# Altium PCB Copy of bug4.PcbDoc
Units mil, origin at the board's own origin, x right, y up, seen from the top; angles counter-clockwise.
Board outline 2630.5 x 2335 mil, 4 copper layers (Top Layer, Mid-Layer 1, Mid-Layer 2, Bottom Layer); 103 components, 85 nets, 361 pads, 50 vias.
Unrouted connection lines stored in the file: 187.
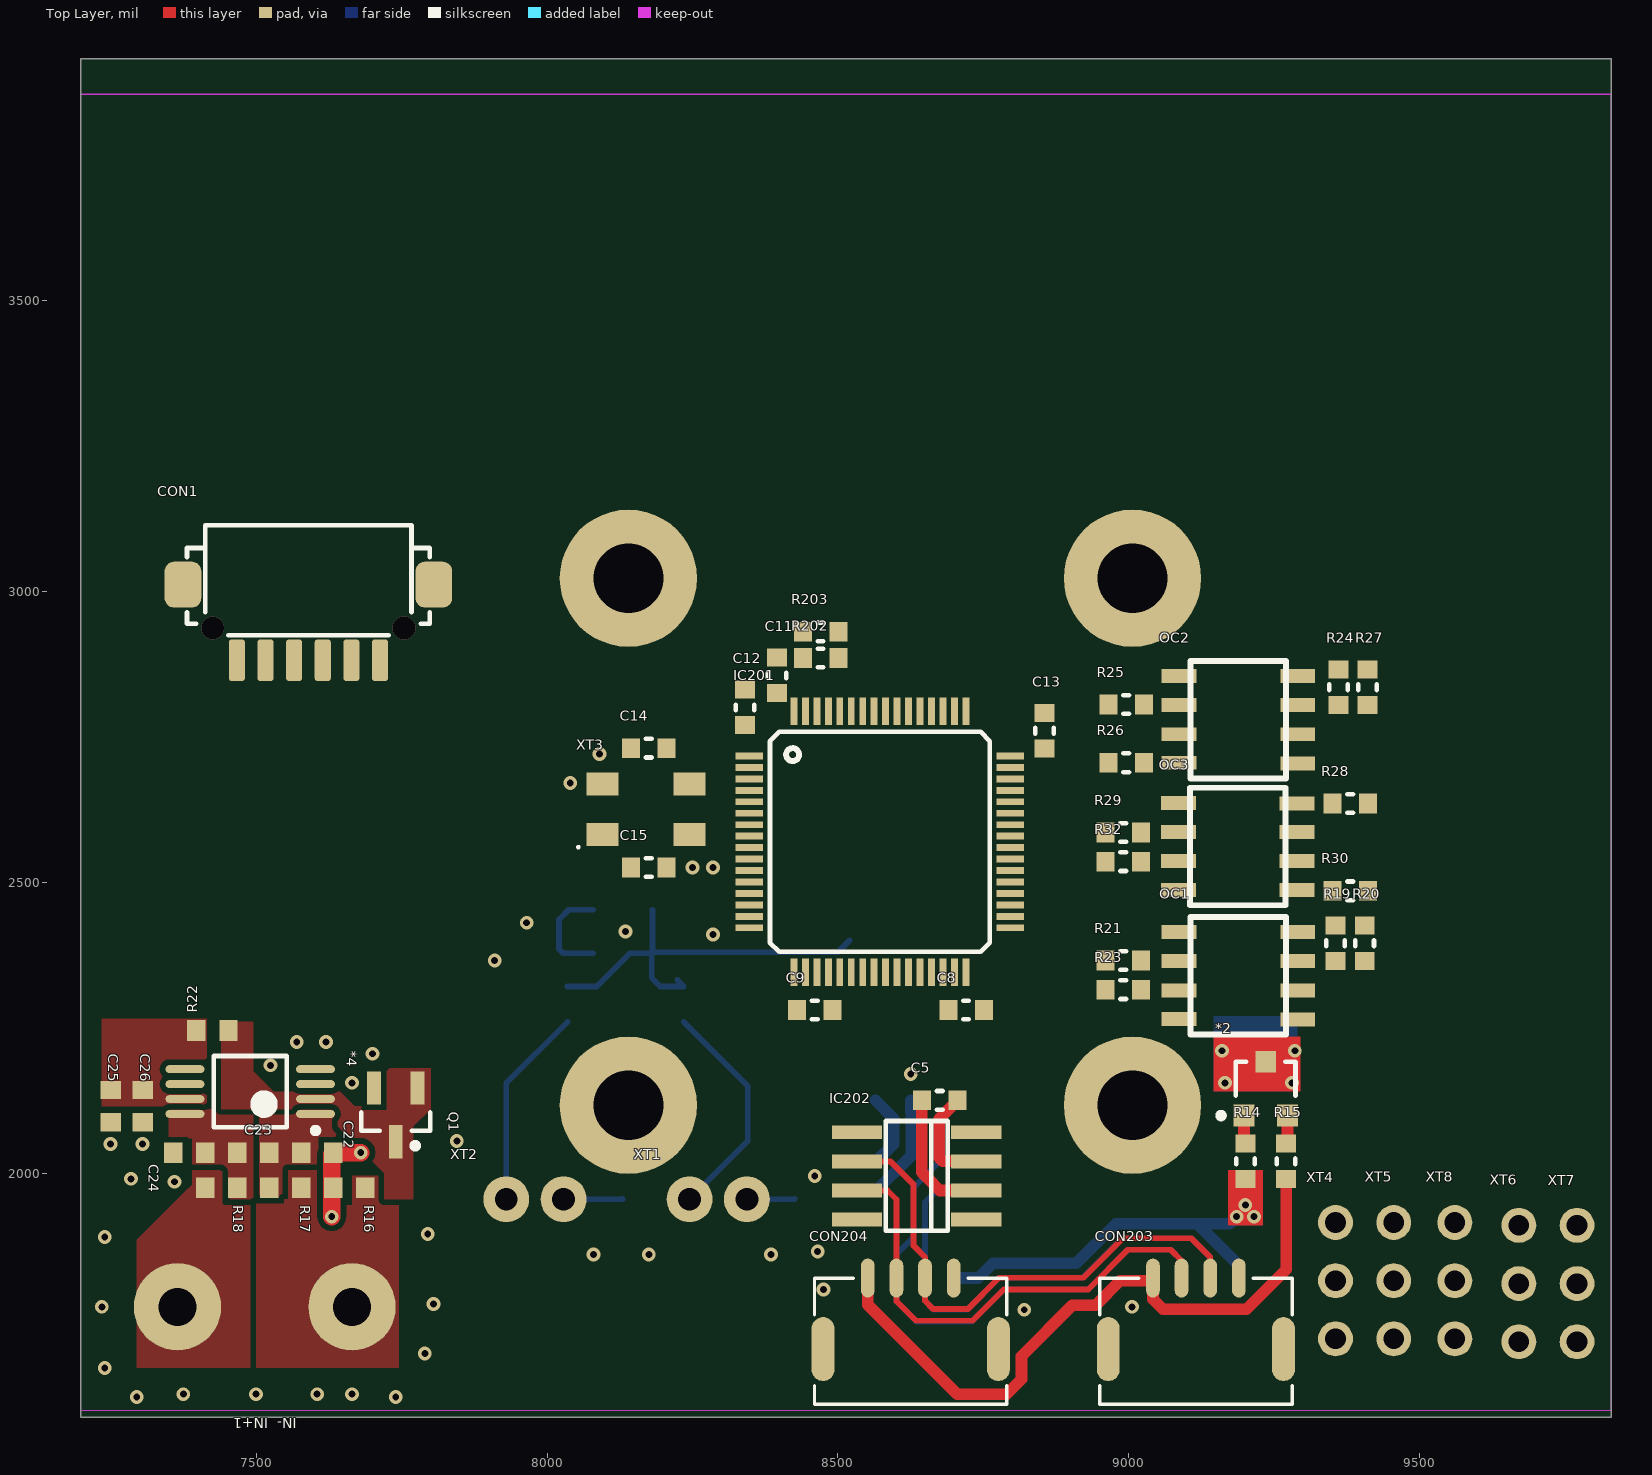
[diagram p0: Top Layer view]
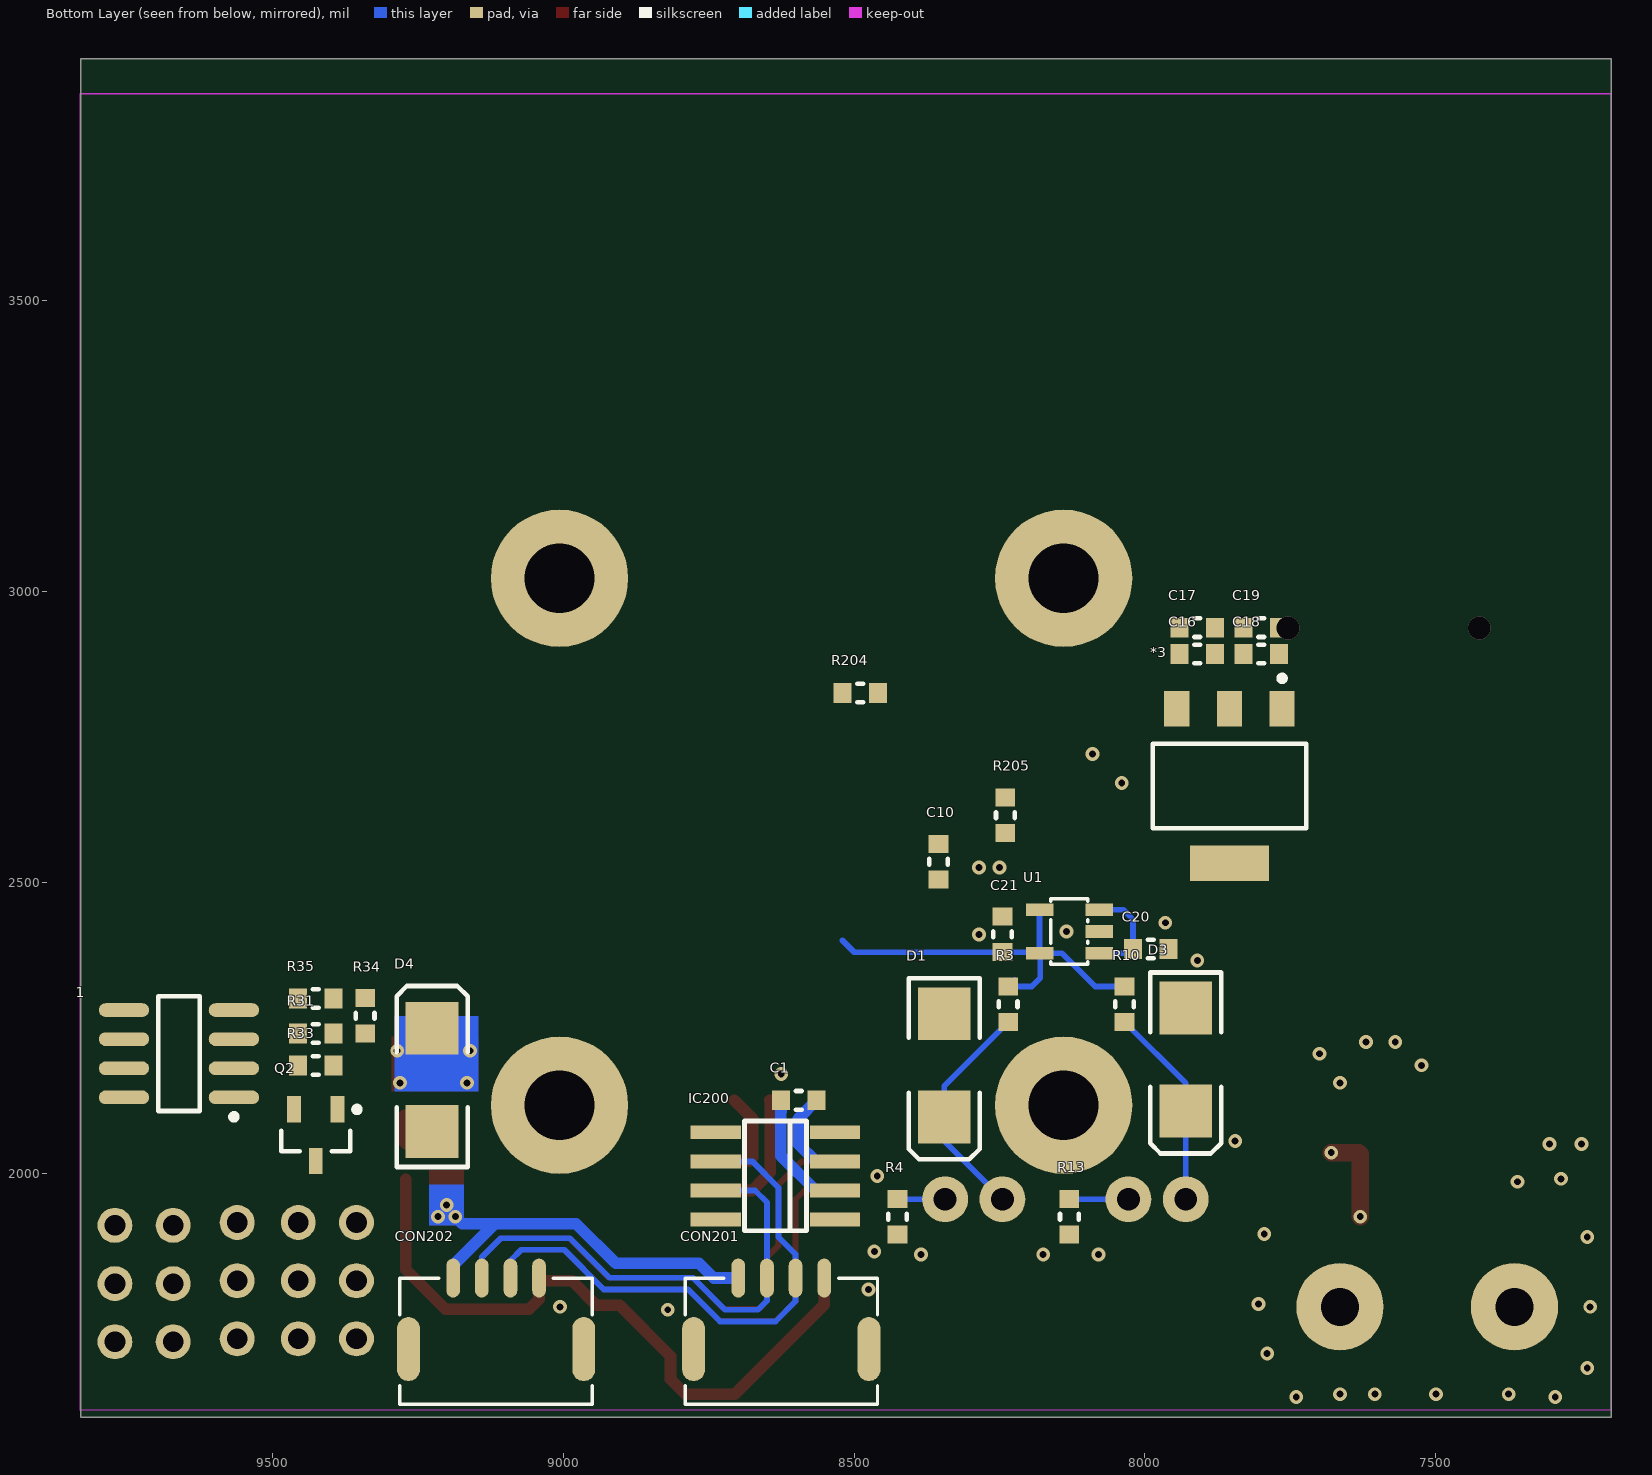
[diagram p1: Bottom Layer view, seen from below]

## Layer stack, top to bottom
Top Solder: solder mask 0.4, Solder Resist, Dk 3.5
Top Layer: signal copper 1.4
Dielectric 1: dielectric 12.6, FR-4, Dk 4.8
Mid-Layer 1: signal copper 1.4
Dielectric2: dielectric 12.6, FR-4, Dk 4.8
Mid-Layer 2: signal copper 1.4
Dielectric3: dielectric 12.6, FR-4, Dk 4.8
Bottom Layer: signal copper 1.4
Bottom Solder: solder mask 0.4, Solder Resist, Dk 3.5

## Board outline
7198.5,1580 9829,1580 9829,3915 7198.5,3915

## Design rules (kind name [scope] priority, off if disabled: settings)
Clearance [All] p1: gap=10 ignorepadtopadclearanceinfootprint=FALSE except(0: Arc-Hole Track-Hole SMDPad-Hole THPad-Hole Via-Hole Fill-Hole Poly-Hole Region-Hole Text-Hole)
PlaneConnect [All] p1: planeconnectstyle=Direct reliefexpansion=20 reliefentries=4 reliefconductorwidth=10 reliefairgap=10
PolygonConnect [All] p1: connectstyle=Direct reliefconductorwidth=10 reliefentries=4 polygonreliefangle="90 Angle" airgapwidth=10
RoutingVias [All] p1: holewidth=28 width=50 viastyle="Through Hole" minholewidth=28 minwidth=50 maxholewidth=28 maxwidth=50
SolderMaskExpansion [All] p1: expansion=4
Width [All] p1: maxlimit=100 minlimit=10 preferedwidth=20
29 further rules are at their usual default settings.

## Components (designator, comment, footprint, x,y, rotation, side; value= is the part's Value field where it differs from the comment)
1 "IRF7105" SO-8_N 9660,2205 r0 bottom
*1 "Component_1" TO-220AB 2735,3660 r0 top
*2 "BAT54_C" sot-23 9235,2145 r0 top
*3 "REG1117-3.3" ZZ311 7855,2665 r0 bottom
*4 "AD8495" PW008_N 7490,2140 r180 top
BQ1 "HC49/S" HS49/S 11720,3130 r90 top
C1 "0.1" SMT0603/VISHAY 8595,2125 r180 bottom value=100nF
C2 "0.1" 1608[0603] 10500,2625 r270 bottom value=100nF
C3 "1206" 2220 10685,2360 r180 bottom value="47uF 25V"
C4 "2220" 2220 10630,2920 r270 bottom value="4.7uF 100v"
C5 "0.1" SMT0603/VISHAY 8675,2125 r180 top value=100nF
C6 "47pF" SMT0603/VISHAY 9385,4365 r0 bottom value=100nF
C7 "4.7nF" SMT0603/VISHAY 9415,4275 r90 bottom value=100nF
C8 "0.1" SMT0603/VISHAY 8720,2280 r0 top value=100nF
C9 "0.1" SMT0603/VISHAY 8460,2280 r0 top value=100nF
C10 "0.1" SMT0603/VISHAY 8355,2535 r270 bottom value=100nF
C11 "0.1" SMT0603/VISHAY 8395,2855 r270 top value=100nF
C12 "0.1" SMT0603/VISHAY 8340,2800 r270 top value=100nF
C13 "0.1" SMT0603/VISHAY 8855,2760 r90 top value=100nF
C14 "10pF" SMT0603/VISHAY 8175,2730 r0 top value=100nF
C15 "10pF" SMT0603/VISHAY 8175,2525 r180 top value=100nF
C16 "0.1" SMT0603/VISHAY 7910,2892.13 r0 bottom value=100nF
C17 "0.1" SMT0603/VISHAY 7910,2937.13 r0 bottom value=100nF
C18 "0.1" SMT0603/VISHAY 7800,2892.13 r0 bottom value=100nF
C19 "0.1" SMT0603/VISHAY 7800,2937.13 r0 bottom value=100nF
C20 "0.1" SMT0603/VISHAY 7990,2385 r180 bottom value=100nF
C21 "0.1" SMT0603/VISHAY 8245,2410 r270 bottom value=100nF
C22 "0.01" 1608[0603] 7605,2035 r180 top value=100nF
C23 "0.1" 1608[0603] 7495,2035 r180 top value=100nF
C24 "0.01" 1608[0603] 7385,2035 r180 top value=100nF
C25 "0.1" 1608[0603] 7250,2115 r270 top value=100nF
C26 "1uF" 1608[0603] 7305,2115 r270 top value=100nF
CON1 "CONN HEADER SH 6POS SIDE 1MM TIN" "HIROSE DF13-6P-1.25H" 7590,3015 r0 top
CON201 "CON-4P-RA" JST_GH-4P-RA 8625,1705 r0 bottom
CON202 "CON-4P-RA" JST_GH-4P-RA 9115,1705 r0 bottom
CON203 "CON-4P-RA" JST_GH-4P-RA 9115,1705 r180 top
CON204 "CON-4P-RA" JST_GH-4P-RA 8625,1705 r180 top
D1 "stb.3.3" SMB 8345,2185 r270 bottom
D2 "B560C" SMC 9550,4410 r270 bottom
D3 "stb.3.3" SMB 7930,2195 r270 bottom
D4 "sm6t15a" SMB 9225,2160 r90 bottom
DA1 "=Device" D8_L_G 10635,2625 r270 bottom
IC200 "SN65HVD232D" SOIC8 8635,1995 r0 bottom
IC201 "STM32F105" TQFP64-10X10 8572,2569 r0 top
IC202 "SN65HVD232D" SOIC8 8635,1995 r180 top
"IN-  IN+1" "X977B02" X977B02 7515,1770 r0 top
L1 "SPM5020T-100M-LR" Inductor 10425,2415 r270 bottom
OC1 "HCPL0631" UCC37322P 9270,2440 r270 top
OC2 "HCPL0631" UCC37322P 9270,2880 r270 top
OC3 "HCPL0631" UCC37322P 9105,2460 r90 top
P1 "Header 4" XT-30PW 10530,3860 r180 top
Q1 "BC848" SOT23_M 7740,2100 r270 top
Q2 "BFS17A" SOT-23_N 9425,2065 r270 bottom
R1 "1k" SMT0603/VISHAY 10095,2967.48 r90 top
R2 "1k" SMT0603/VISHAY 10095,3097.48 r90 top
R3 "1k" SMT0603/VISHAY 8235,2290 r270 bottom
R4 "1k" SMT0603/VISHAY 8425,1925 r270 bottom
R5 "1210" 14-1210 10450,2875 r90 bottom value=0R
R6 "442k" SMT0603/VISHAY 10805,2815 r180 bottom
R7 "16.9k" SMT0603/VISHAY 9350,4275 r90 bottom
R8 "36k" SMT0603/VISHAY 10805,2515 r0 bottom
R9 "200k" SMT0603/VISHAY 10775,2710 r270 bottom
R10 "1k" SMT0603/VISHAY 8035,2290 r270 bottom
R11 "6.8k" SMT0603/VISHAY 10775,2595 r270 bottom
R12 "243k" SMT0603/VISHAY 10835,2710 r90 bottom
R13 "1k" SMT0603/VISHAY 8130,1925 r270 bottom
R14 "0.0R" SMT0603/VISHAY 9200,2020 r90 top value=3K9
R15 "0.0R" SMT0603/VISHAY 9270,2020 r90 top value=3K9
R16 "1M" 1608[0603] 7660,1975 r0 top
R17 "100R" 1608[0603] 7550,1975 r180 top
R18 "100R" 1608[0603] 7440,1975 r0 top
R19 "Res3" SMT0603/VISHAY 9355,2395 r90 top value=2kR
R20 "Res3" SMT0603/VISHAY 9405,2395 r90 top value=2kR
R21 "330" SMT0603/VISHAY 8990,2365 r0 top
R22 "1k" 1608[0603] 7425,2245 r180 top
R23 "330" SMT0603/VISHAY 8990,2315 r0 top
R24 "Res3" SMT0603/VISHAY 9360,2835 r90 top value=2kR
R25 "330" SMT0603/VISHAY 8995,2805 r0 top
R26 "330" SMT0603/VISHAY 8995,2705 r0 top
R27 "Res3" SMT0603/VISHAY 9410,2835 r90 top value=2kR
R28 "330" SMT0603/VISHAY 9380,2635 r0 top
R29 "Res3" SMT0603/VISHAY 8990,2585 r0 top value=2kR
R30 "330" SMT0603/VISHAY 9380,2485 r0 top
R31 "Res3" SMT0603/VISHAY 9425,2240 r0 bottom value=2kR
R32 "Res3" SMT0603/VISHAY 8990,2535 r0 top value=2kR
R33 "Res3" SMT0603/VISHAY 9425,2185 r180 bottom value=200R
R34 "Res3" SMT0603/VISHAY 9340,2270 r270 bottom value=2kR
R35 "Res3" SMT0603/VISHAY 9425,2300 r180 bottom value=200R
R202 "3K9" SMT0603/VISHAY 8470,2885 r0 top
R203 "3K9" SMT0603/VISHAY 8470,2930 r0 top
R204 "3K9" SMT0603/VISHAY 8489.44,2825 r0 bottom
R205 "200R" SMT0603/VISHAY 8240,2615 r270 bottom
U1 "3.3V" SOT23-5L 8130,2415 r90 bottom
VD1 "KP-1608SRC-PRV/KINGBRIGHT" 1.6x0.8SMTLED/KINGBRIGHT 10035,2967.48 r270 top
VD2 "KP-1608SRC-PRV/KINGBRIGHT" 1.6x0.8SMTLED/KINGBRIGHT 10035,3097.48 r270 top
XT1 "JST-XH_R" JST-XH-2R 8245,1955 r0 top
XT2 "JST-XH_R" JST-XH-2R 7930,1955 r0 top
XT3 "8 MHz" DFN220P320X110-4N 8170,2625 r0 top
XT4 "PLT-3" PCBComponent_1 9355,1915 r270 top
XT5 "PLT-3" PCBComponent_1 9455,1915 r270 top
XT6 "PLT-3" PCBComponent_1 9670,1910 r270 top
XT7 "PLT-3" PCBComponent_1 9770,1910 r270 top
XT8 "PLT-3" PCBComponent_1 9560,1915 r270 top

## Footprints (in the part's own frame and the unit in brackets; to place one, negate y for a bottom-side part, rotate by r counter-clockwise, add the part's x,y. Pads: shape width x height; smd on the part's side, far side on the other; paste and mask are expansions set on the pad)
1.6x0.8SMTLED/KINGBRIGHT [mm]
  rect 0.8x0.8 smd: 1(-0.825,0) 2(0.825,0)
  silkscreen extent -1.47,-0.64 1.47,0.64, body extent -0.8,-0.4 0.8,0.4, height 0.7
14-1210 [mm] "Chip Resistor, Body 3.2x2.5mm, IPC High Density"
  rect 1.1x2.6 smd: 1(-1.35,0) 2(1.35,0)
  silkscreen extent -0.4,-1.2 0.4,1.2, body extent -1.68,-1.32 1.67,1.32, height 0.9
1608[0603] [mm] "Chip Capacitor, Body 1.6x0.8mm, IPC High Density"
  rect 0.8x0.9 smd: 1(-0.7,0) 2(0.7,0)
  body extent -0.87,-0.48 0.88,0.48, height 1.3
2220 [mm] "Chip Capacitor, Body 5.7x5.0mm, IPC High Density"
  rect 1.4x5.2 smd: 1(-2.5,0) 2(2.5,0)
  silkscreen extent -1.4,-2.5 1.4,2.5, body extent -2.95,-2.63 2.95,2.62, height 1.4
D8_L_G [mm] "SOIC, 8-Leads, Body 4.9x3.9mm, Pitch 1.27mm, IPC High Density"
  oval 1.9x0.6 smd: 1(-2.35,1.905) 2(-2.35,0.635) 3(-2.35,-0.635) 4(-2.35,-1.905) 5(2.35,-1.905) 6(2.35,-0.635) 7(2.35,0.635) 8(2.35,1.905)
  rect 1.9x5 smd: 9(0,0)
  silkscreen extent -2.47,-2.5 1,2.88, body extent -2,-2.5 2,2.5, height 1.75
DFN220P320X110-4N [mm] "DFN, 4-Leads, Body 5.00x3.20mm, Pitch 2.20mm, IPC Medium Density"
  rect 1.4x1 smd: 1(-1.9,-1.1) 3(1.9,1.1) G(-1.9,1.1) G(1.9,-1.1)
  silkscreen extent -3,-1.7 -2.9,-1.6, body extent -2.55,-1.65 2.55,1.65, height 1.1
"HIROSE DF13-6P-1.25H" [mm] "DF13 Series 1.25mm pitch miniature crimping connector single row"
  rrect30% 0.7x1.8 smd: 1(-3.125,-3.4) 2(-1.875,-3.4) 3(-0.625,-3.4) 4(0.625,-3.4) 5(1.875,-3.4) 6(3.125,-3.4)
  rrect50% 1.6x2 smd: M(-5.475,-0.1) M(5.475,-0.1)
  silkscreen extent -5.3,-2.3 5.3,2.5, body extent -6.08,-3.9 6.07,2.6, height 3.59
HS49/S [mm]
  round 1.2 hole 0.7: 1(0,0) 2(4.65,0)
  silkscreen extent -3.47,-2.5 8.13,2.5
Inductor [mil]
  rect 55x110 smd: 1(-87,0) 2(87,0)
  body extent -106,-100 106,101, height 78
JST-XH-2R [mm]
  round 2 hole 1: 1(0,0) 2(2.5,0)
  body extent -2.45,-9.14 4.95,0.38, height 5.95
JST_GH-4P-RA [mm]
  rrect100% 0.6x1.7 smd: 1(1.875,-2.91) 2(0.625,-2.91) 3(-0.625,-2.91) 4(-1.875,-2.91)
  rrect100% 1x2.8 smd: M$0(-3.825,0.19) M$1(3.825,0.19)
  silkscreen extent -4.2,-2.9 4.2,2.6, body extent -4.25,-2.94 4,1.91, height 4.35
PCBComponent_1 [mil]
  round 60 hole 35.5: 1(0,0) 2(100,0) 3(200,0)
  body extent -13,-51 595,49, height 300
PW008_N [mm] "SOP, 8-Leads, Body 3x4.4mm, Pitch 0.65mm, IPC Medium Density"
  oval 1.7x0.35 smd: 1(-2.85,0.975) 2(-2.85,0.325) 3(-2.85,-0.325) 4(-2.85,-0.975) 5(2.85,-0.975) 6(2.85,-0.325) 7(2.85,0.325) 8(2.85,0.975)
  silkscreen extent -2.98,-1.55 1.6,1.82, body extent -2.25,-1.55 2.25,1.55, height 3.1
SMB [mm] "DO-214-AA/SMB; 2 C-Bend Leads; Body 5.3 x 3.6 mm, inc. leads (LxW)"
  rect 2.3x2.3 smd: 1(-2.25,0) 2(2.25,0)
  silkscreen extent -3.8,-1.55 4.1,1.55
SMC [mm] "DO-214-AB/SMC; 2 C-Bend Leads; Body 7.9 x 5.9 mm, inc. leads (LxW)"
  rect 2.4x3.3 smd: 1(-3.475,0) 2(3.475,0)
  silkscreen extent -5.08,-2.05 5.42,2.06
SMT0603/VISHAY [mm]
  rect 0.787x0.864 smd: 1(-0.775,0) 2(0.775,0)
  silkscreen extent -0.13,-0.41 0.13,0.41, body extent -0.78,-0.43 0.78,0.43, height 0.45
SO-8_N [mm] "8-Pin Small Outline Integrated Circuit 1.27 mm Pitch, IPC Medium Density"
  oval 2.2x0.6 smd: 1(-2.4,1.905) 2(-2.4,0.635) 3(-2.4,-0.635) 4(-2.4,-1.905) 5(2.4,-1.905) 6(2.4,-0.635) 7(2.4,0.635) 8(2.4,1.905)
  silkscreen extent -2.52,-2.5 0.9,2.88, body extent -1.95,-2.45 1.95,2.45, height 1.75
SOIC8 [mil]
  rect 86.61x23.62 smd: 1(-102.36,75) 2(-102.36,25) 3(-102.36,-25) 4(-102.36,-75) 5(102.36,-75) 6(102.36,-25) 7(102.36,25) 8(102.36,75)
  silkscreen extent -53,-94 53,94, body extent -79,-98 79,98, height 69
SOT23-5L [mil]
  rect 21.65x47.24 smd: 1(-37.4,-51.18) 2(0,-51.18) 3(37.4,-51.18) 4(37.4,51.18) 5(-37.4,51.18)
  silkscreen extent -56,-32 56,32
SOT23_M [mm] "SOT23, 3-Leads, Body 2.9x1.3mm, Pitch 0.95mm, Lead Span 2.3mm - Reverse Pinning, IPC Low Density"
  rect 1.45x0.6 smd: 1(1.175,0) 2(-1.175,-0.95) 3(-1.175,0.95)
  silkscreen extent -0.1,-1.5 1.47,1.5, body extent -0.7,-1.5 0.7,1.5, height 1.1
sot-23 [mm] "SOT-23; 3 Leads; Body 3.1 x 2.5 mm, inc. leads (LxW max)"
  rect 0.9x0.95 smd: 1(-0.95,-1.175) 2(0.95,-1.175) 3(0,1.175)
  silkscreen extent -2.07,-1.3 1.3,1.18
SOT-23_N [mm] "SOT23, 3-Leads, Body 2.9x1.3mm, Pitch 0.95mm, Lead Span 2.3mm, IPC Medium Density"
  rect 1.15x0.6 smd: 1(-1.125,0.95) 2(-1.125,-0.95) 3(1.125,0)
  silkscreen extent -1.25,-1.5 0.7,1.92, body extent -0.7,-1.5 0.7,1.5, height 1.11
TO-220AB [mm] "TO, Thru-Hole, Vertical, Heatsink Mounted; 3 In-Line Leads; Pitch 2.54 mm"
  rect 1.6x1.6 hole 1: 1(-2.54,0)
  round 1.6 hole 1: 2(0,0) 3(2.54,0)
  silkscreen extent -5.35,-1.85 5.35,2.85
TQFP64-10X10 [mm]
  rect 1.2x0.3 smd: 1(-5.7,3.75) 2(-5.7,3.25) 3(-5.7,2.75) 4(-5.7,2.25) 5(-5.7,1.75) 6(-5.7,1.25) 7(-5.7,0.75) 8(-5.7,0.25) 9(-5.7,-0.25) 10(-5.7,-0.75) 11(-5.7,-1.25) 12(-5.7,-1.75) 13(-5.7,-2.25) 14(-5.7,-2.75) 15(-5.7,-3.25) 16(-5.7,-3.75) 33(5.7,-3.75) 34(5.7,-3.25) 35(5.7,-2.75) 36(5.7,-2.25) 37(5.7,-1.75) 38(5.7,-1.25) 39(5.7,-0.75) 40(5.7,-0.25) 41(5.7,0.25) 42(5.7,0.75) 43(5.7,1.25) 44(5.7,1.75) 45(5.7,2.25) 46(5.7,2.75) 47(5.7,3.25) 48(5.7,3.75)
  rect 0.3x1.2 smd: 17(-3.75,-5.7) 18(-3.25,-5.7) 19(-2.75,-5.7) 20(-2.25,-5.7) 21(-1.75,-5.7) 22(-1.25,-5.7) 23(-0.75,-5.7) 24(-0.25,-5.7) 25(0.25,-5.7) 26(0.75,-5.7) 27(1.25,-5.7) 28(1.75,-5.7) 29(2.25,-5.7) 30(2.75,-5.7) 31(3.25,-5.7) 32(3.75,-5.7) 49(3.75,5.7) 50(3.25,5.7) 51(2.75,5.7) 52(2.25,5.7) 53(1.75,5.7) 54(1.25,5.7) 55(0.75,5.7) 56(0.25,5.7) 57(-0.25,5.7) 58(-0.75,5.7) 59(-1.25,5.7) 60(-1.75,5.7) 61(-2.25,5.7) 62(-2.75,5.7) 63(-3.25,5.7) 64(-3.75,5.7)
  silkscreen extent -4.8,-4.8 4.8,4.8, body extent -5,-5 5,5, height 1.6
UCC37322P [mil]
  rect 24x60 smd: 1(26,-184) 2(76,-184) 3(126,-184) 4(175,-184) 5(176,20) 6(126,20) 7(76,20) 8(26,20)
  silkscreen extent 0,-164 202,0, body extent 0,-164 202,0, height 143
X977B02 [mil]
  round 150 hole 65: 1(-150,0) 2(150,0)
  body extent -305,-175 305,175, height 373
XT-30PW [mil]
  round 118 hole 70: 1(-98,0) 2(98,0)
  round 100 / inner round 118 / far side round 118 hole 45: 4(-216,393) 5(216,393)
ZZ311 [mm] "SOT-223/SC-73; 4 Leads; Body 6.7 x 7.3 mm, inc. leads (LxW max)"
  rect 1.1x1.55 smd: 1(-2.3,-3.375) 2(0,-3.375) 3(2.3,-3.375)
  rect 3.45x1.55 smd: 4(0,3.375)
  silkscreen extent -3.35,-4.82 3.35,1.85

## Part data
1: library part Component_1
*3: library part REG1117-5, "800mA and 1A Low Dropout Positive Regulator 2.85V, 3.3V, 5V, and Adjustable", ComponentLink1Description="Manufacturer Link", ComponentLink1URL=http://www.ti.com/, ComponentLink2Description=Datasheet, ComponentLink2URL=http://www-s.ti.com/sc/ds/REG1117.pdf, DatasheetVersion=Sep-1997, LatestRevisionDate=17-Jul-2002, LatestRevisionNote="Re-released for DXP Platform.", PackageDescription="SOT-223/SC-73; 4 Leads; Body 6.7 x 7.3 mm, inc. leads (LxW max)", PackageReference=ZZ311, PackageVersion=revC, Published=8-Jun-2000, Publisher="Altium Limited"
BQ1: "Crystal Oscillator", PackageReference=hs_49u
C1 C2 C5 C6 C7 C8 C9 C10 C11 C12 C13 C14 C15 C16 C17 C18 C19 C20 C21 C22 C23 C24 C25 C26: library part "Cap Semi", "Capacitor (Semiconductor SIM Model)", LatestRevisionDate=29-May-2009, LatestRevisionNote="IPC-7351 Footprint Added.", PackageDescription="Chip Capacitor", PackageReference=C1206, Published=8-Jun-2000, Publisher="Altium Limited"
C3: library part "Cap Semi", "100uF", LatestRevisionDate=29-May-2009, LatestRevisionNote="IPC-7351 Footprint Added.", PackageDescription="Chip Capacitor", PackageReference=C1206, Published=8-Jun-2000, Publisher="Altium Limited"
C4: library part "Cap Semi", "4.7uF 100v", LatestRevisionDate=29-May-2009, LatestRevisionNote="IPC-7351 Footprint Added.", PackageDescription="Chip Capacitor", PackageReference=C2220, Published=8-Jun-2000, Publisher="Altium Limited"
CON1: library part DF13_6P_1, DIGIKEY#=455-1806-1-ND, MANF="JST Sales America Inc", MANF#=SM06B-SRSS-TB(LF)(SN)
CON201 CON202 CON203 CON204: "Connector Receptacle 4 Position 0.049\" (1.25mm) Tin Surface Mount, Right Angle", DIGIKEY#=WM4948CT-ND, MANF=Molex, MANF#=5023860470
D1 D3 D4: library part Diode, "Default Diode", Code_JEDEC=DO-214-AB, LatestRevisionDate=17-Jul-2002, LatestRevisionNote="Re-released for DXP Platform.", PackageDescription="DO-214-AB/SMC; 2 C-Bend Leads; Body 7.9 x 5.9 mm, inc. leads (LxW)", PackageReference=SMC, PackageVersion=Sep-1996, Published=8-Jun-2000, Publisher="Altium Limited"
D2: "60V 0.5A Shottcky Diode"
DA1: library part TPS54560, "150mA Low-Noise Low-Dropout Regulator Whit Shutdown"
IC200 IC202: "IC CAN TRANSCEIVER 3.3V 8-SOIC", DIGIKEY#=296-26344-1-ND, MANF="Texas Instruments", MANF#=SN65HVD232DR, SN65HVD232=SN65HVD232
IC201: "MCU ARM 256KB FLASH MEM 64-LQFP", OPERATING_TEMP="-40°C ~ 105°C (TA)", DIGIKEY#=497-8918-ND, MANF=STMicroelectronics, MANF#=STM32F105RCT6, STM32F105=STM32F105
L1: library part L-EPCOS_B82464
OC1 OC2 OC3: "dual optocouplers"
P1: "Header, 4-Pin", LatestRevisionDate=17-Jul-2002, LatestRevisionNote="Re-released for DXP Platform.", Publisher="Altium Limited"
Q1: library part BF547, "NPN 1 GHz Wideband Transistor", ComponentAvailability=Obsolete, ComponentLink1Description="Manufacturer Link", ComponentLink1URL=http://www.semiconductors.philips.com/, ComponentLink2Description=Datasheet, ComponentLink2URL=http://www.semiconductors.philips.com/acrobat/datasheets/BF547_3.pdf, ComponentLink3Description="Discontinuation Notice", ComponentLink3URL=http://www.semiconductors.philips.com/pip/old/BF547.html, DatasheetVersion=Sep-1995, LatestRevisionDate=12-Dec-2006, LatestRevisionNote="IPC-7351 Footprint Added.", PackageDescription="3-Pin SOT-23 Package 0.95 mm Pitch, 2.3 mm Lead Span", PackageReference=SOT23, PackageVersion=May-1999, Published=17-Sep-2003, Publisher="Altium Limited"
Q2: library part 2N3904, "NPN General Purpose Amplifier", ComponentLink1Description="Manufacturer Link", ComponentLink1URL=http://www.fairchildsemi.com/, ComponentLink2Description=Datasheet, ComponentLink2URL=http://www.fairchildsemi.com/ds/2N%2F2N3904.pdf, DatasheetVersion=1997, LatestRevisionDate=15-Jan-2003, LatestRevisionNote="PCB Footprint 'BCY-W3/D4.7' replaced", PackageDescription="TO, Flat Index; 3 In-Line, Axial Leads; Body Dia. 4.5mm; Leads 0.51 x 0.48 mm (max)", PackageReference=TO-92A, PackageVersion=Sep-1998, Published=8-Jun-2000, Publisher="Altium Limited"
R1 R2 R3 R4 R10 R13 R21 R23 R25 R26 R28 R30: library part CRCW060310K0FKEA/MURATA, "10k", PackageReference=0603
R5: library part Res3, "fuse", LatestRevisionDate=29-May-2009, LatestRevisionNote="IPC-7351 Footprint Added.", PackageDescription="Chip Resistor", PackageReference=J1-0603, Published=8-Jun-2000, Publisher="Altium Limited"
R6 R7 R8 R9 R11 R12 R16 R17 R18 R22: library part R0402
R14 R15 R202 R203 R204: library part 3K9-0402, PACKAGE=0402, TOLERANCE=1%, DIGIKEY#=311-3.90KLRCT-ND, MANF=Yageo, MANF#=RC0402FR-073K9L
R19 R20 R24 R27 R29 R31 R32 R33 R34 R35: "Resistor", LatestRevisionDate=29-May-2009, LatestRevisionNote="IPC-7351 Footprint Added.", PackageDescription="Chip Resistor", PackageReference=J1-0603, Published=8-Jun-2000, Publisher="Altium Limited"
R205: library part 200R-0402, PACKAGE=0402, TOLERANCE=1%, ASSEMBLY=DNM, DIGIKEY#=311-200LRCT-ND, MANF=Yageo, MANF#=RC0402FR-07200RL
U1: library part LP5907MFX-3.3/NOPB, "IC REG LDO 3.3V 0.25A SOT23-5", Current - Limit (Min)=-, Current - Output=250mA, Manufacturer="Texas Instruments", Operating Temperature="-40°C ~ 125°C", Package / Case="SC-74A, SOT-753", Supplier Device Package=SOT-23, Supplier Part Number 1=296-38557-1-ND, Voltage - Input="Up to 5.5V", Category="Integrated Circuits (ICs)", ComponentLink1Description=http://www.ti.com/lit/ds/symlink/lp5907.pdf, ComponentLink1URL=http://www.ti.com/lit/ds/symlink/lp5907.pdf, Mounting Type="Surface Mount", Packaging="Cut Tape (CT)", Part Status=Active, Pricing 1="1=0.57, 10=0.487, 100=0.3634, 500=0.28552, 1000=0.22063 (USD)", Regulator Topology="Positive Fixed", RoHS="RoHS Compliant", Stock 1=39845, Supplier 1=Digi-Key, Voltage - Dropout (Typical)=-, Voltage - Output=3.3V
VD1 VD2: "Red 0603 LED", PackageReference=0603
XT1 XT2: library part TempXT_R
XT3: library part ABM3B-8.000MHZ-10-1-U-T, "FA-238 16.0000MB-C3", Frequency Stability=±10ppm, Load Capacitance=10pF, Manufacturer="Abracon LLC", Operating Mode=Fundamental, Operating Temperature="-10°C ~ 60°C", Package / Case="4-SMD, No Lead", Ratings=-, Supplier Part Number 1=535-9721-1-ND, Category="Crystals, Oscillators, Resonators", ComponentLink1Description=http://www.abracon.com/Resonators/abm3b.pdf, ComponentLink1URL=http://www.abracon.com/Resonators/abm3b.pdf, Frequency Tolerance=±10ppm, Height - Seated (Max)="0.043\" (1.10mm)", Manufacturer Part Number=ABM3B-8.000MHZ-10-1-U-T, Mounting Type="Surface Mount", Packaging="Cut Tape (CT)", Part Status=Active, Pricing 1="1=0.69, 10=0.578, 50=0.5198, 100=0.462, 500=0.4389 (USD)", Pricing 2="1000=0.336, 3000=0.315, 5000=0.3045, 10000=0.294 (USD)", RoHS="RoHS Compliant", Size / Dimension="0.197\" L x 0.126\" W (5.00mm x 3.20mm)", Stock=35437, Supplier 1=Digi-Key, Supplier 2=Digi-Key, Supplier Part Number 2=535-9721-2-ND, Type="MHz Crystal"

## Free pads (board coordinates)
  round 236 hole 120: 10(8139.79,2116.52) 11(8139.79,3022.03) 12(9005.93,3022.03) 13(9005.93,2116.52)

## Via types
v1: diameter 23.62/0/23.62/23.62 (per signal layer), hole 11.81, Top Layer to Bottom Layer, 48 vias
v2: diameter 39.37, hole 39.37, Top Layer to Bottom Layer, tented both sides, 2 vias

## Nets (pads, with @x,y where several pads share a name; then routed paths per layer and width w, separated by ;. In a path a pad name is that pad's centre, name@x,y a point inside that pad or via, vN(x,y) a via of type N, cw(c..) or ccw(c..) an arc to the next point about the centre after c; other vN are vias at no path point)
BackupPWM: IC201.17
BOOT0: IC201.60 R204.2
CAN1_RX: IC200.4 IC201.44
CAN1_TX: IC200.1 IC201.45
CAN2_RX: IC201.33 IC202.4
CAN2_TX: IC201.34 IC202.1
CoolerPWM: IC201.27 R21.1
FuelSensor: IC201.50 OC3.7 R32.2
GND: *1.1 *3.1 *4.3 C1.1 C3.1 C4.1 C5.2 C6.2 C7.2 C8.1 C9.1 C10.1 C11.1 C12.1 C13.1 C14.1 C15.1 C16.1 C17.1 C18.1 C19.1 C20.2 C21.1 C22.1 C24.2 C25.2 C26.2 CON1.6 CON201.4 CON202.4 CON203.4 CON204.4 D1.1 D2.1 D3.1 D4.1 DA1.7 DA1.9 IC200.2 IC201.10 IC201.12 IC201.18 IC201.24 IC201.31 IC201.47 IC201.63 IC202.2 OC2.3 OC3.5 P1.2 Q1.2 R4.2 R9.2 R11.1 R12.1 R13.2 R16.1 R204.1 U1.2 VD1.2 VD2.2 XT3.G | length 602.3
  Top Layer w20: C5.2 8644.06,2124.57 8644.06,2001.3 8655,1990.36 8655,1990 8675,1970 IC202.2
  Top Layer w30: v1(7630,1925) 7630,2032.44 C22.1 v1(7680,2035)
  Bottom Layer w20: IC200.2 8566.04,1970 8625.94,2029.91 8625.94,2105.97 8625.51,2106.4 C1.1
  other v1: 7295,1615 7740,1615 7375,1620 7500,1620 7605,1620 7665,1620 7240,1665 7790,1690 8820,1765 7235,1770 9005,1770 7805,1775 8475,1800 8080,1860 8175,1860 8385,1860 8465,1865 7240,1890 7795,1895 7360,1985 7285,1990 8460,1995 7250,2050 7305,2050 7845,2055 7665,2155 8625,2170 7525,2185 7700,2205 7570,2225 7620,2225 7910,2365 8285,2410 8135,2415 7965,2430 8250,2525 8285,2525 8040,2670 8090,2720
GND_OUT: 1.1 OC1.5 OC2.5 OC3.2 Q2.2 XT4.3 XT5.3 XT6.3 XT8.3
GPIO_PMU_1: IC201.56
GPIO_PMU_2: IC201.57
I2C_SCL: IC201.61 R202.2
I2C_SDA: IC201.62 R203.2
IBAT: *4.2 IC201.11 Q1.1 Q1.3 R22.1
IGEN: *4.5 *4.6 IC201.21
Ignition_on_boolean: IC201.15 R26.1
LED_R: IC201.37 R2.2
Net1_2: 1.2 R33.1
Net1_4: 1.4 R35.1
Net1_5: 1.5 1.6 XT7.2
Net1_7: 1.7 1.8 OC3.3 XT7.3
Net*2_1: *2.1 R14.2 | length 49.2
  Top Layer w20: *2.1 9197.6,2052.91 R14.2
Net*2_2: *2.2 R15.2 | length 49.2
  Top Layer w20: R15.2 9272.4,2052.91 *2.2
Net*4_1: *4.1 C22.2 C23.1 R17.2
Net*4_8: *4.8 C23.2 C24.1 R18.2
NetC2_1: C2.1 DA1.1
NetC2_2: C2.2 D2.2 DA1.8 L1.1
NetC4_2: C4.2 DA1.2 R5.1 R6.2
NetC6_1: C6.1 DA1.6 R7.2
NetC7_1: C7.1 R7.1
NetCON201_2: CON201.2 CON202.2 IC200.7 | length 862.1
  Bottom Layer w10: IC200.7 8670,1970 8649.61,1949.61 CON201.2 8649.61,1780.39 8665,1765 8721.72,1765 8776.72,1820 8920,1820 8988.03,1888.04 9106.97,1888.04 9139.61,1855.39 CON202.2
NetCON201_3: CON201.3 CON202.3 IC200.6 | length 926.6
  Bottom Layer w10: IC200.6 8675,2020 8629.61,1974.61 8629.61,1889.61 8600.39,1860.39 CON201.3 8600.39,1779.61 8635,1745 8730,1745 8785,1800 8930,1800 8998.03,1868.04 9071.97,1868.04 9090.39,1849.61 CON202.3
NetCON203_2: CON203.2 CON204.2 IC202.7 | length 846.2
  Top Layer w10: IC202.7 8585,1970 8600.39,1954.61 CON204.2 8600.39,1779.61 8633.9,1746.11 8731.1,1746.11 8785,1800 8930,1800 8998.03,1868.04 9071.97,1868.04 9090.39,1849.61 CON203.2 CON203.2@9090.39,1814.57
NetCON203_3: CON203.3 CON204.3 IC202.6 | length 922.7
  Top Layer w10: IC202.6 8590,2020 8630,1980 8630,1875 8650,1855 8650,1814.96 8649.61,1814.57 8649.61,1780.39 8663.9,1766.11 8722.82,1766.11 8776.72,1820 8921.72,1820 8989.75,1888.04 9106.97,1888.04 9139.61,1855.39 CON203.3 CON203.3@9139.61,1814.57
NetDA1_3: DA1.3 R6.1 R12.2
NetDA1_4: DA1.4 R9.1
NetDA1_5: DA1.5 R8.1 R11.2
"NetIN-  IN+1_1": "IN-  IN+1.1" R18.1
"NetIN-  IN+1_2": "IN-  IN+1.2" R16.2 R17.1
NetOC1_2: OC1.2 R21.2
NetOC1_3: OC1.3 R23.2
NetOC1_6: OC1.6 R20.1 XT5.1
NetOC1_7: OC1.7 R19.1 XT4.1
NetOC2_2: OC2.2 R25.2
NetOC2_4: OC2.4 R26.2
NetOC2_6: OC2.6 R27.1 R34.1 R35.2
NetOC2_7: OC2.7 R24.1 XT6.1
NetOC3_1: OC3.1 R30.1
NetOC3_4: OC3.4 R28.1
NetQ2_1: Q2.1 R34.2
NetQ2_3: Q2.3 R31.1 R33.2
NetR1_1: R1.1 VD1.1
NetR2_1: R2.1 VD2.1
NetR4_1: R4.1 XT1.2 | length 81.8
  Bottom Layer w10: XT1.2 8424.49,1955 R4.1
NetR13_1: R13.1 XT2.2 | length 101.8
  Bottom Layer w10: XT2.2 8129.49,1955 R13.1
NetR28_2: R28.2 XT7.1
NetR30_2: R30.2 XT8.1
NRST: IC201.7
OSC_IN_STM: C14.2 IC201.5 XT3.3
OVER_T: IC201.8 R205.1
PB_3: IC201.55
PC_10: IC201.51
PC_11: IC201.52
PC_12: IC201.53
PD_2: IC201.54
PWM: IC201.14
Q0: C15.2 IC201.6 XT3.1
StrtPWM: IC201.23 R23.1
SWCLK: CON1.5 IC201.49
SWDIO: CON1.4 IC201.46
TachoInF: IC201.16 OC3.6 R29.2
ThrottlePWM: IC201.26 R25.1
USART1_RX_inside: CON1.3 IC201.59
USART1_TX_inside: CON1.2 IC201.58
VBAT_SENSE: C21.2 IC201.22 R3.1 R10.1 U1.4 U1.5 | length 712.2
  Bottom Layer w10: R10.1 8085.51,2320.51 8142.6,2377.6 U1.5 ; U1.4 U1.5 ; R3.1@8224.09,2331.42 R3.1 8194.49,2320.51 8180,2335 8180,2376.42 U1.5 ; 8520,2400 8499.49,2379.49 C21.2 8183.07,2379.49 U1.5
VCC_3.3: *3.2 *3.4 *4.7 C1.2 C5.1 C8.2 C9.2 C10.2 C11.2 C12.2 C13.2 C18.2 C19.2 C25.1 C26.1 IC200.3 IC201.1 IC201.13 IC201.19 IC201.32 IC201.48 IC201.64 IC202.3 OC1.1 OC1.4 R1.2 R22.2 R29.1 R32.1 R202.1 R203.1 R205.2 | length 341.7
  Top Layer w20: C5.1 8674.06,2093.54 8674.06,2025.94 8680,2020 IC202.3
  Bottom Layer w20: IC200.3 8566.04,2020 8595.94,2049.91 8595.94,2093.54 C1.2
VCC_50v: P1.1 R5.2
VCC_CAN: *2.3 *3.3 C16.2 C17.2 C20.1 D4.2 OC3.8 U1.1 U1.3 | length 177.2
  Bottom Layer w10: U1.1 8027.91,2377.6 C20.1 8020.51,2435.51 8037.4,2452.4 U1.3
  other v1: 9165,2155 9280,2155 9160,2210 9285,2210
VCC_CAN1: CON201.1 CON202.1 R14.1 | length 652.9
  Bottom Layer w20: CON201.1 8740.93,1819.57 8766.36,1845 8909.64,1845 8977.68,1913.04 9117.32,1913.04 ; v1(9185,1925) 9173.03,1913.04 9117.32,1913.04 ; CON202.1 9188.82,1841.54 9117.32,1913.04
  other v1: 9215,1925 9200,1945
VCC_CAN2: CON203.1 CON204.1 R15.1 | length 1153.9
  Top Layer w20: CON204.1@8551.18,1814.57 8551.18,1773.82 8705,1620 8789.63,1620 8815.27,1645.65 8815.27,1685.28 8902.64,1772.64 8942.64,1772.64 8984.57,1814.57 CON203.1@9041.18,1814.57 ; CON203.1 CON203.1@9041.18,1814.57 ; R15.1 9270,1834.11 9202,1766.11 9058.58,1766.11 9041.18,1783.51 CON203.1@9041.18,1814.57
VCC_servo: 1.3 *1.3 C3.2 L1.2 R8.2 R31.2
VCC_servo_5: *1.2 OC1.8 OC2.8 R19.2 R20.2 R24.2 R27.2 XT4.2 XT5.2 XT6.2 XT8.2
VTMP: D1.2 IC201.9 R3.2 XT1.1 | length 391.5
  Bottom Layer w10: R3.2 8345,2149.49 D1.2 8345,2055 XT1.1
VTMP2: D3.2 IC201.25 R10.2 XT2.1 | length 348
  Bottom Layer w10: XT2.1 D3.2 7930,2154.49 R10.2
pads on no net: *4.4 BQ1.1 BQ1.2 CON1.1 CON1.M CON201.M$0 CON201.M$1 CON202.M$0 CON202.M$1 CON203.M$0 CON203.M$1 CON204.M$0 CON204.M$1 IC200.5 IC200.8 IC201.2 IC201.3 IC201.4 IC201.20 IC201.28 IC201.29 IC201.30 IC201.35 IC201.36 IC201.38 IC201.39 IC201.40 IC201.41 IC201.42 IC201.43 IC202.5 IC202.8 OC2.1 P1.4 P1.5
copper on no net:
  other v2: 7425.63,2936.26 7754.37,2936.26

## Polygon pours and split planes (outlines as drawn)
IBAT on Top Layer "Top Layer-No Net" (solid, pour order 30): 7645,2140 7670,2115 7725,2115 7725,2175 7730,2180 7800,2180 7800,2110 7770,2080 7770,1955 7720,1955 7720,2000 7640,2080 7640,2110 7440,2110 7440,2260 7495,2260 7495,2175 7530,2140
Net*4_1 on Top Layer "Top Layer-No Net" (solid, pour order 38): 7500,2110 7500,1955 7555,1955 7555,2005 7610,2005 7610,2060 7640,2060 7640,2110
Net*4_8 on Top Layer "Top Layer-No Net" (solid, pour order 36): 7495,1955 7445,1955 7445,2005 7390,2005 7390,2060 7350,2060 7350,2110 7495,2110
"NetIN-  IN+1_1" on Top Layer "Top Layer-No Net" (solid, pour order 34): 7445,2005 7390,2005 7390,1980 7375,1965 7295,1885 7295,1665 7495,1665 7495,1945 7445,1945
"NetIN-  IN+1_2" on Top Layer "Top Layer-No Net" (solid, pour order 32): 7555,2005 7555,1955 7500,1955 7500,1665 7745,1665 7745,1945 7725,1945 7720,1950 7720,1995 7665,1995 7665,1945 7615,1945 7615,2005
VCC_3.3 on Top Layer "Top Layer-No Net" (solid, pour order 28): 7415,2115 7235,2115 7235,2265 7415,2265
no net on Top Layer "Top Layer-No Net" (solid, pour order 12): 11720,946.01
no net on Bottom Layer "Top Layer-No Net" (solid, pour order 22): 9335,4200
no net on Bottom Layer "Top Layer-No Net" (solid, pour order 20): 9620,4660
no net on Bottom Layer "Top Layer-No Net" (solid, pour order 18): 6510,2750

## Keep-outs
Keep-Out Layer:
  lines w1: 2189.5,1310 ccw(c2190,1310) 2190,1309.5 ; 2189.5,1350 ccw(c2190,1350) 2190,1349.5 ; 7198.5,1592 7198.5,3853 ; 7199,1592 9828,1592 ; 7200,3854 9829,3854 9829,1593 ; 7200,3854.5 ccw(c7200,3854) 7199.5,3854 cw(c7200,3854) 7200,3854.5 ; 7200,3854.5 9829,3854.5 ; 9829,3854.5 cw(c9829,3854) 9829.5,3854 ; 9829,3854.5 cw(c9829,3854) 9829.5,3854 ; 9829.5,1593 cw(c9829,1593) 9829,1592.5 ccw(c9829,1593) 9829.5,1593 ; 9829.5,1593 9829.5,3854 ; 2189.5,3535 cw(c2190,3535) 2190,3535.5 ccw(c2190,3535) 2189.5,3535 ; 4770,1309.5 ccw(c4770,1310) 4770.5,1310 cw(c4770,1310) 4770,1309.5 ; 4770,3535.5 cw(c4770,3535) 4770.5,3535 ccw(c4770,3535) 4770,3535.5

## Other copper
Top Layer:
  rectangle net VCC_CAN: 9145,2140 9295,2235
  rectangle net VCC_CAN1: 9170,1910 9230,2005
Bottom Layer:
  rectangle net VCC_CAN: 9145,2140 9290,2270
  rectangle net VCC_CAN1: 9170,1910 9230,1980

## Text inside footprints (layer, text, board x,y; h text height)
*1: Top Overlay "3" at 2815.32,3509.41 h59.06; Top Overlay "1" at 2625.16,3509.41 h59.06; Top Overlay "2" at 2715.32,3509.41 h59.06